# Altium PCB Motor_MS_v1.0.PcbDoc
Units mm, origin at the board's own origin, x right, y up, seen from the top; angles counter-clockwise.
Board outline 24.9 x 24.8 mm, 2 copper layers (Top Layer, Bottom Layer), stack 1.569 mm thick; 2 components, 8 nets, 22 pads, 2 vias.
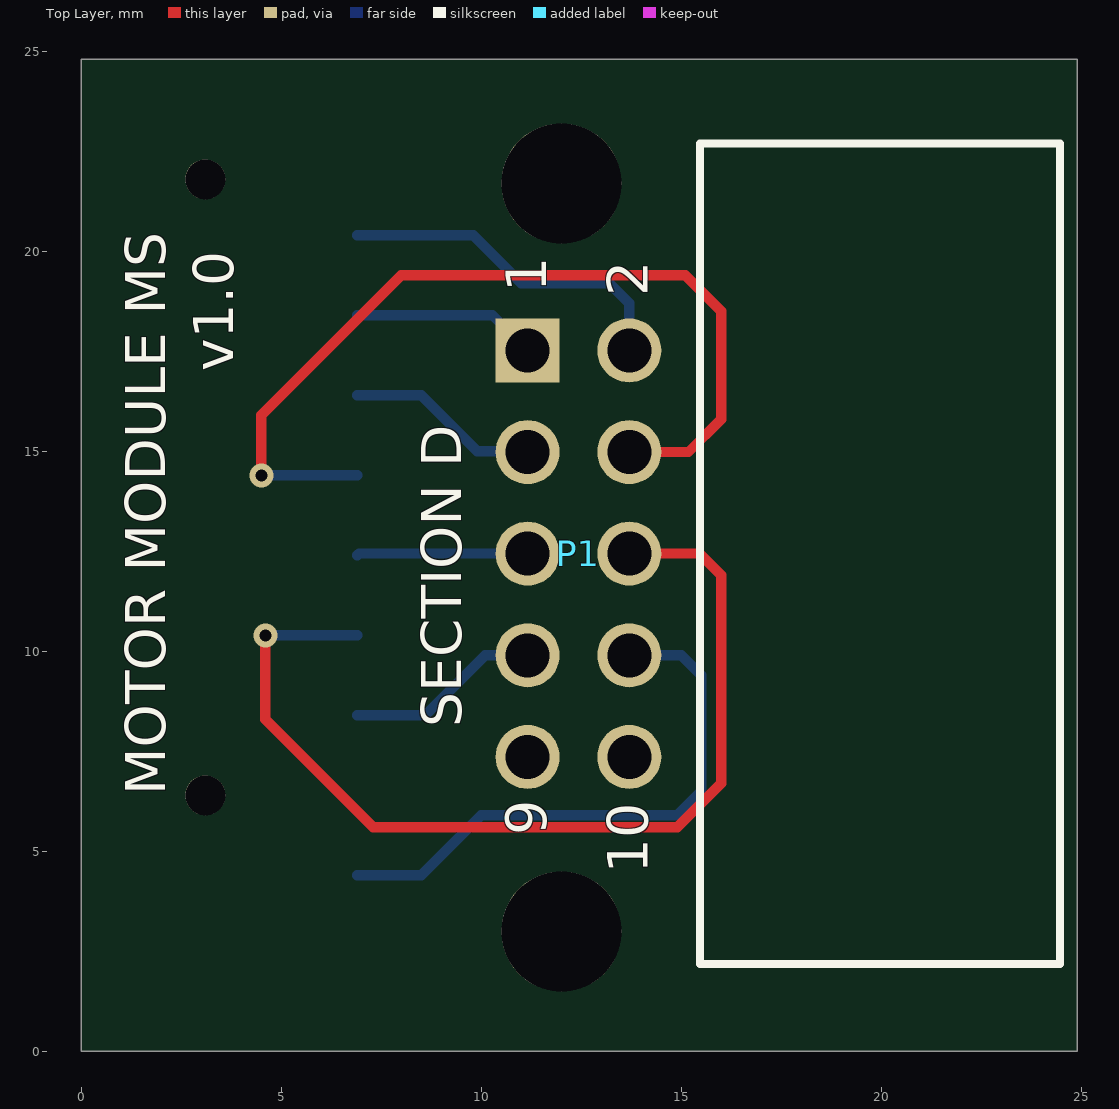
[diagram p0: Top Layer view]
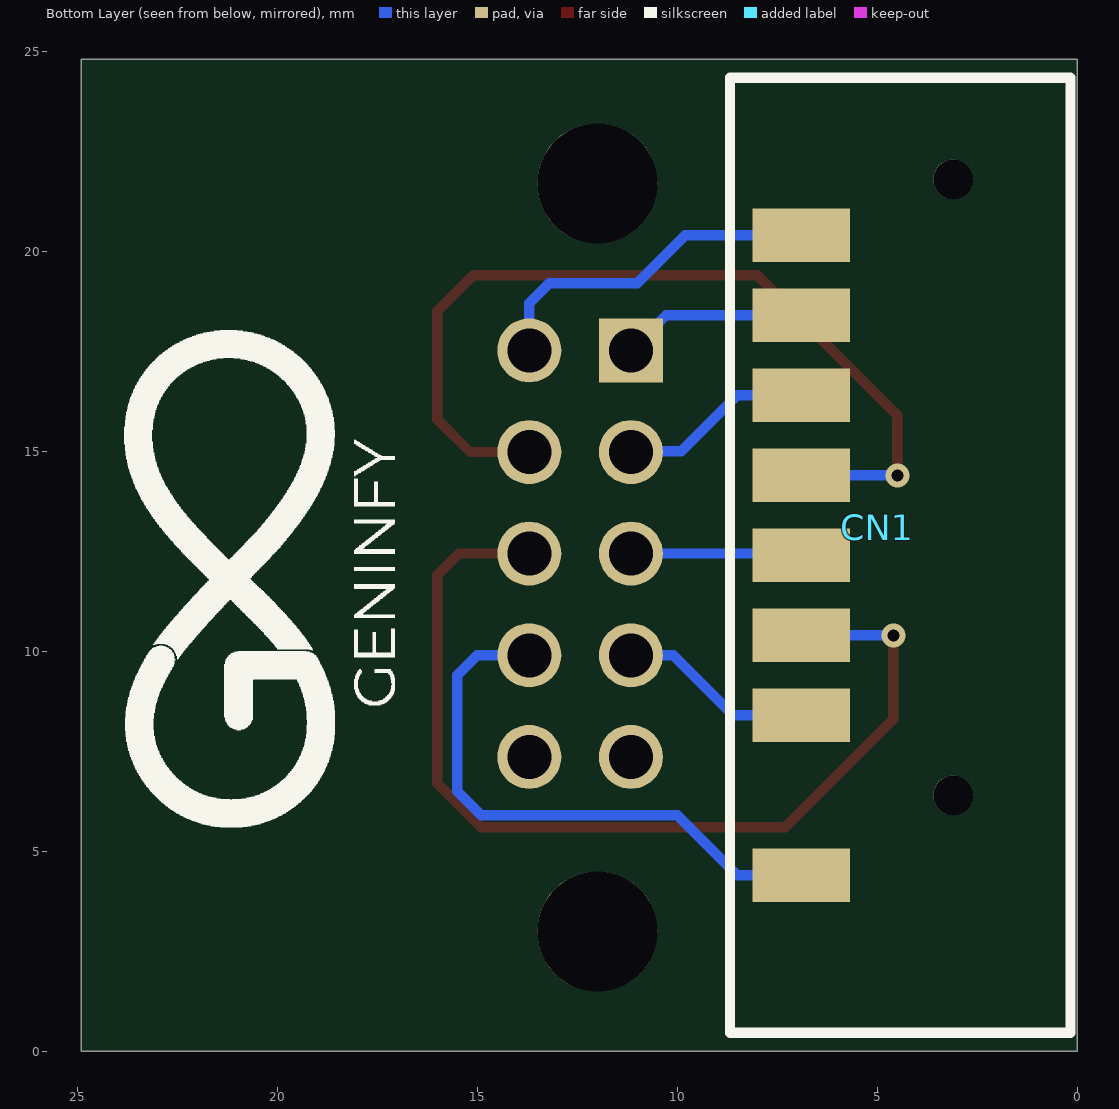
[diagram p1: Bottom Layer view, seen from below]

## Layer stack, top to bottom
Top Solder: solder mask 0.0254, SM-001, Dk 4
Top Layer: signal copper 0.035
Dielectric 1: core 1.4986, Core-043, Dk 4.3
Bottom Layer: signal copper 0.035
Bottom Solder: solder mask 0.0254, SM-001, Dk 4

## Board outline
0,0 24.9,0 24.9,24.8 0,24.8

## Design rules (kind name [scope] priority, off if disabled: settings)
Clearance [All] p1: gap=0.254 ignorepadtopadclearanceinfootprint=FALSE except(0: Arc-Hole Track-Hole SMDPad-Hole THPad-Hole Via-Hole Fill-Hole Poly-Hole Region-Hole Text-Hole)
PolygonConnect [All] p1: connectstyle=Relief reliefconductorwidth=0.254 reliefentries=4 polygonreliefangle="90 Angle" airgapwidth=0.254
RoutingVias [All] p1: holewidth=0.711 width=1.27 viastyle="Through Hole" minholewidth=0.711 minwidth=1.27 maxholewidth=0.711 maxwidth=1.27
SolderMaskExpansion [All] p1: expansion=0.102 istentingtop=FALSE
Width [All] p1: maxlimit=0.254 minlimit=0.254 preferedwidth=0.254
30 further rules are at their usual default settings.

## Components (designator, comment, footprint, x,y, rotation, side; value= is the part's Value field where it differs from the comment)
CN1 "Battery CONN" 1747786-1 6.9,4.4 r90 bottom
P1 "61201021721" 61201021721 19.965,12.44 r90 top

## Footprints (in the part's own frame and the unit in brackets; to place one, negate y for a bottom-side part, rotate by r counter-clockwise, add the part's x,y. Pads: shape width x height; smd on the part's side, far side on the other; paste and mask are expansions set on the pad)
1747786-1 [mm]
  rect 1.33x2.43 smd: 1(0,0) 2(4,0) 3(6,0) 4(8,0) 5(10,0) 6(12,0) 7(14,0) 8(16,0)
  round 1 hole 1 unplated: ""(2,-3.8) ""(17.4,-3.8)
  silkscreen extent -3.94,-6.73 19.94,1.78, body extent -3.6,-6.21 19.6,0.69, height 6.56
61201021721 [mm] "10 pins, right angled, gold plating"
  rect 1.6x1.6 hole 1.1: 1(5.08,8.805)
  round 1.6 hole 1.1: 2(5.08,6.265) 3(2.54,8.805) 4(2.54,6.265) 5(0,8.805) 6(0,6.265) 7(-2.54,8.805) 8(-2.54,6.265) 9(-5.08,8.805) 10(-5.08,6.265)
  silkscreen extent -10.26,-4.5 10.26,4.5, body extent -10.18,-4.42 10.18,9.13, height 9.23

## Part data
CN1: library part 1747786-1
P1: library part CMP-1502-00021-1, "Male Box Header WR-BHD, THT, Angled, pitch 2.54 mm, 10 pins", Contact Resistance=20mOhm, Manufacturer="Wurth Elektronik", Operating Temperature=-40to125degC, Withstanding Voltage=500VAC, Working Voltage=250VAC, Datasheet URL=https://katalog.we-online.de/em/datasheet/6120xx21721.pdf, Gender=Male, Manufacturer URL=http://www.we-online.de, Mounting Technology=THT, Orientation=Angled, Package Reference=61201021721, Packaging=Tray, Part Number=61201021721, Pin Number=10, Pitch=2.54mm, Published Date=August2018, Publisher=WurthElektronik

## Free pads (board coordinates)
  round 3 hole 3 unplated: ""(12,3) ""(12,21.7)

## Via types
v1: diameter 0.6, hole 0.3, Top Layer to Bottom Layer, tented both sides, 2 vias

## Nets (pads, with @x,y where several pads share a name; then routed paths per layer and width w, separated by ;. In a path a pad name is that pad's centre, name@x,y a point inside that pad or via, vN(x,y) a via of type N, cw(c..) or ccw(c..) an arc to the next point about the centre after c; other vN are vias at no path point)
+3V3: CN1.8 P1.2 | length 8.7
  Bottom Layer w0.254: CN1.8 9.8,20.4 11,19.2 13.2,19.2 13.7,18.7 P1.2
GND: CN1.7 P1.1 | length 4.6
  Bottom Layer w0.254: CN1.7 10.28,18.4 P1.1
MAIN_DIR: CN1.6 P1.3 | length 4.8
  Bottom Layer w0.254: CN1.6 8.5,16.4 9.9,15 11.14,15 P1.3
MAIN_PWM: CN1.5 P1.4 | length 22.6
  Top Layer w0.254: v1(4.5,14.4) 4.5,15.9 8,19.4 15.1,19.4 16,18.5 16,15.8 15.18,14.98 P1.4
  Bottom Layer w0.254: v1(4.5,14.4) CN1.5
MOT_FAN: CN1.1 P1.8 | length 14.4
  Bottom Layer w0.254: CN1.1 8.5,4.4 10,5.9 14.9,5.9 15.5,6.5 15.5,9.4 15,9.9 P1.8
RPM_A: CN1.4 P1.5 | length 4.3
  Bottom Layer w0.254: CN1.4 6.94,12.44 P1.5
RPM_B: CN1.3 P1.6 | length 25.1
  Top Layer w0.254: v1(4.6,10.4) 4.6,8.3 7.3,5.6 14.9,5.6 16,6.7 16,11.9 15.46,12.44 P1.6
  Bottom Layer w0.254: v1(4.6,10.4) CN1.3
TEMP: CN1.2 P1.7 | length 4.9
  Bottom Layer w0.254: CN1.2 8.6,8.4 10.1,9.9 P1.7
pads on no net: CN1. P1.9 P1.10

## Silkscreen, mask and mechanical layers (free items; w line width, h text height)
Top Overlay:
  text "v1.0" at 3.8,17 h1 r90
  text "SECTION D" at 9.5,8.1 h1 r90
  text "MOTOR MODULE MS" at 2.1,6.4 h1 r90
Bottom Overlay:
  drawing of 9 lines, arcs and shapes, not listed

## Text inside footprints (layer, text, board x,y; h text height)
P1: Top Overlay "9" at 11.625,5.4 h1.02 r90; Top Overlay "10" at 14.165,4.44 h1.02 r90; Top Overlay "2" at 14.165,18.88 h1.02 r90; Top Overlay "1" at 11.625,18.98 h1.02 r90